# Altium PCB PCB_RX.PcbDoc
Units mil, origin at the board's own origin, x right, y up, seen from the top; angles counter-clockwise.
Board outline 3202.76 x 2149.61 mil, 2 copper layers (Top Layer, Bottom Layer); 112 components, 67 nets, 338 pads, 86 vias.
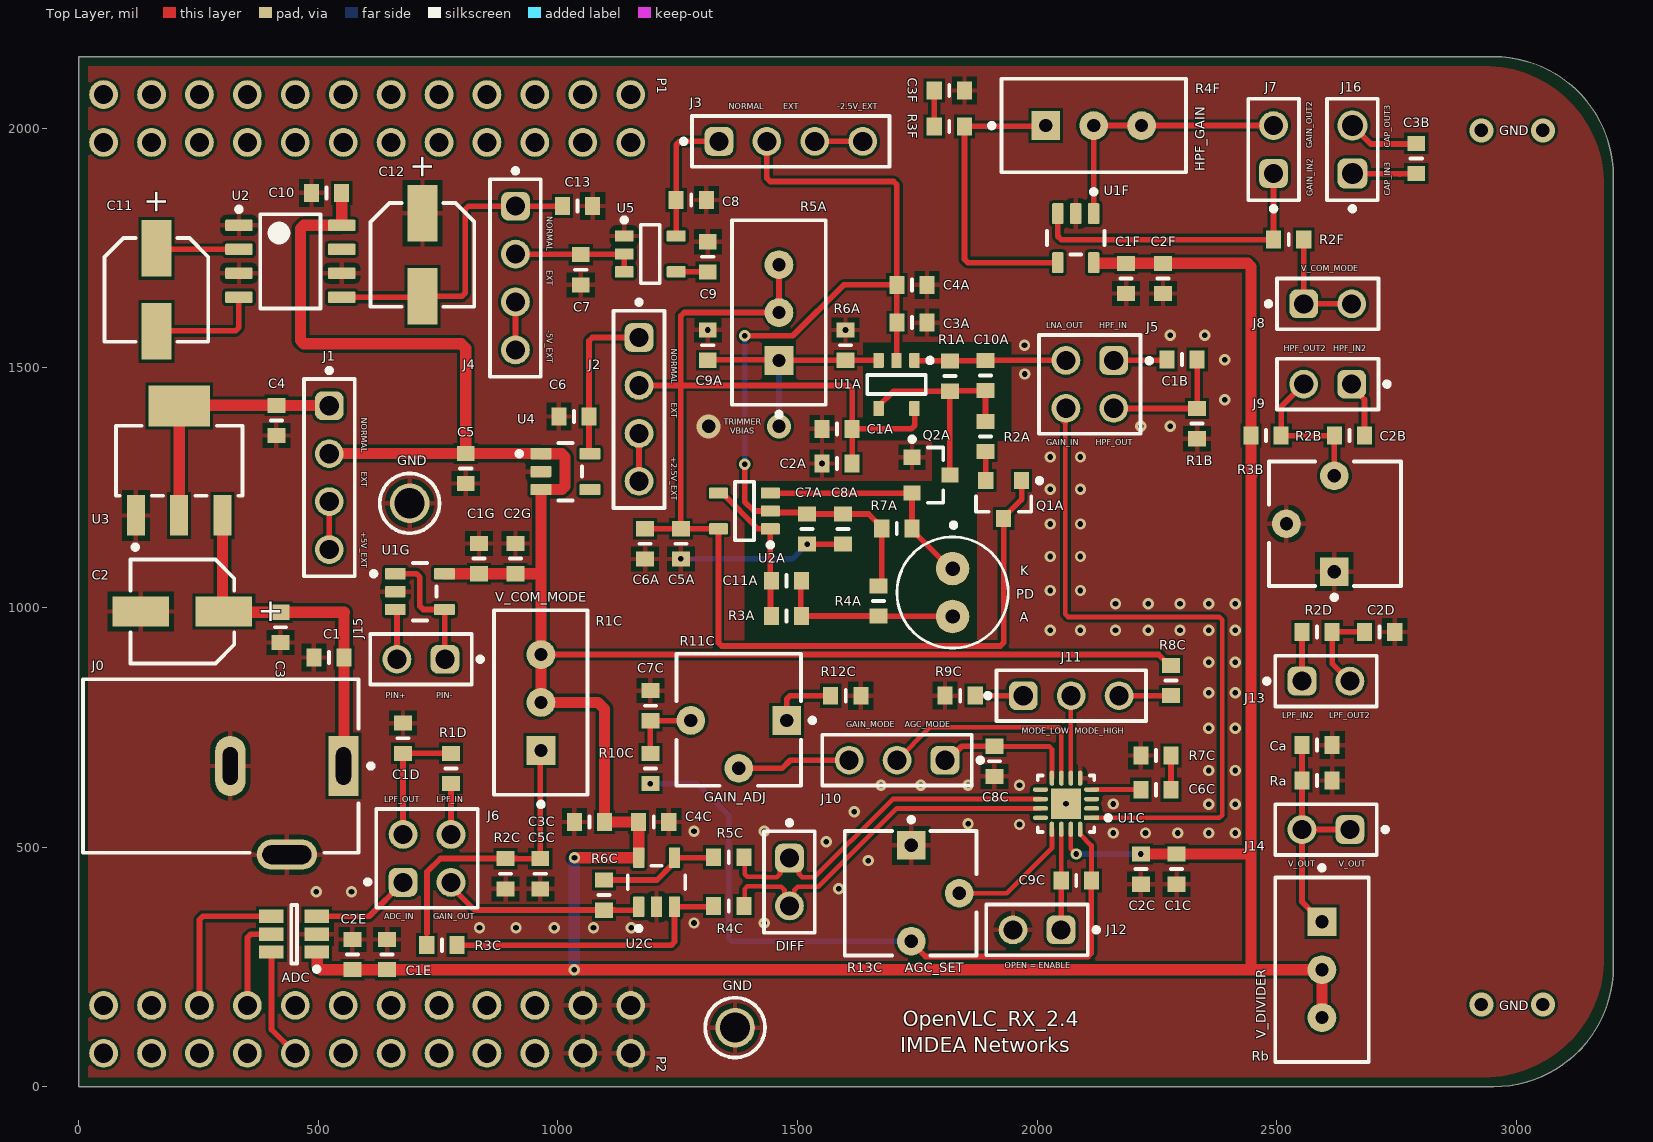
[diagram p0: Top Layer view]
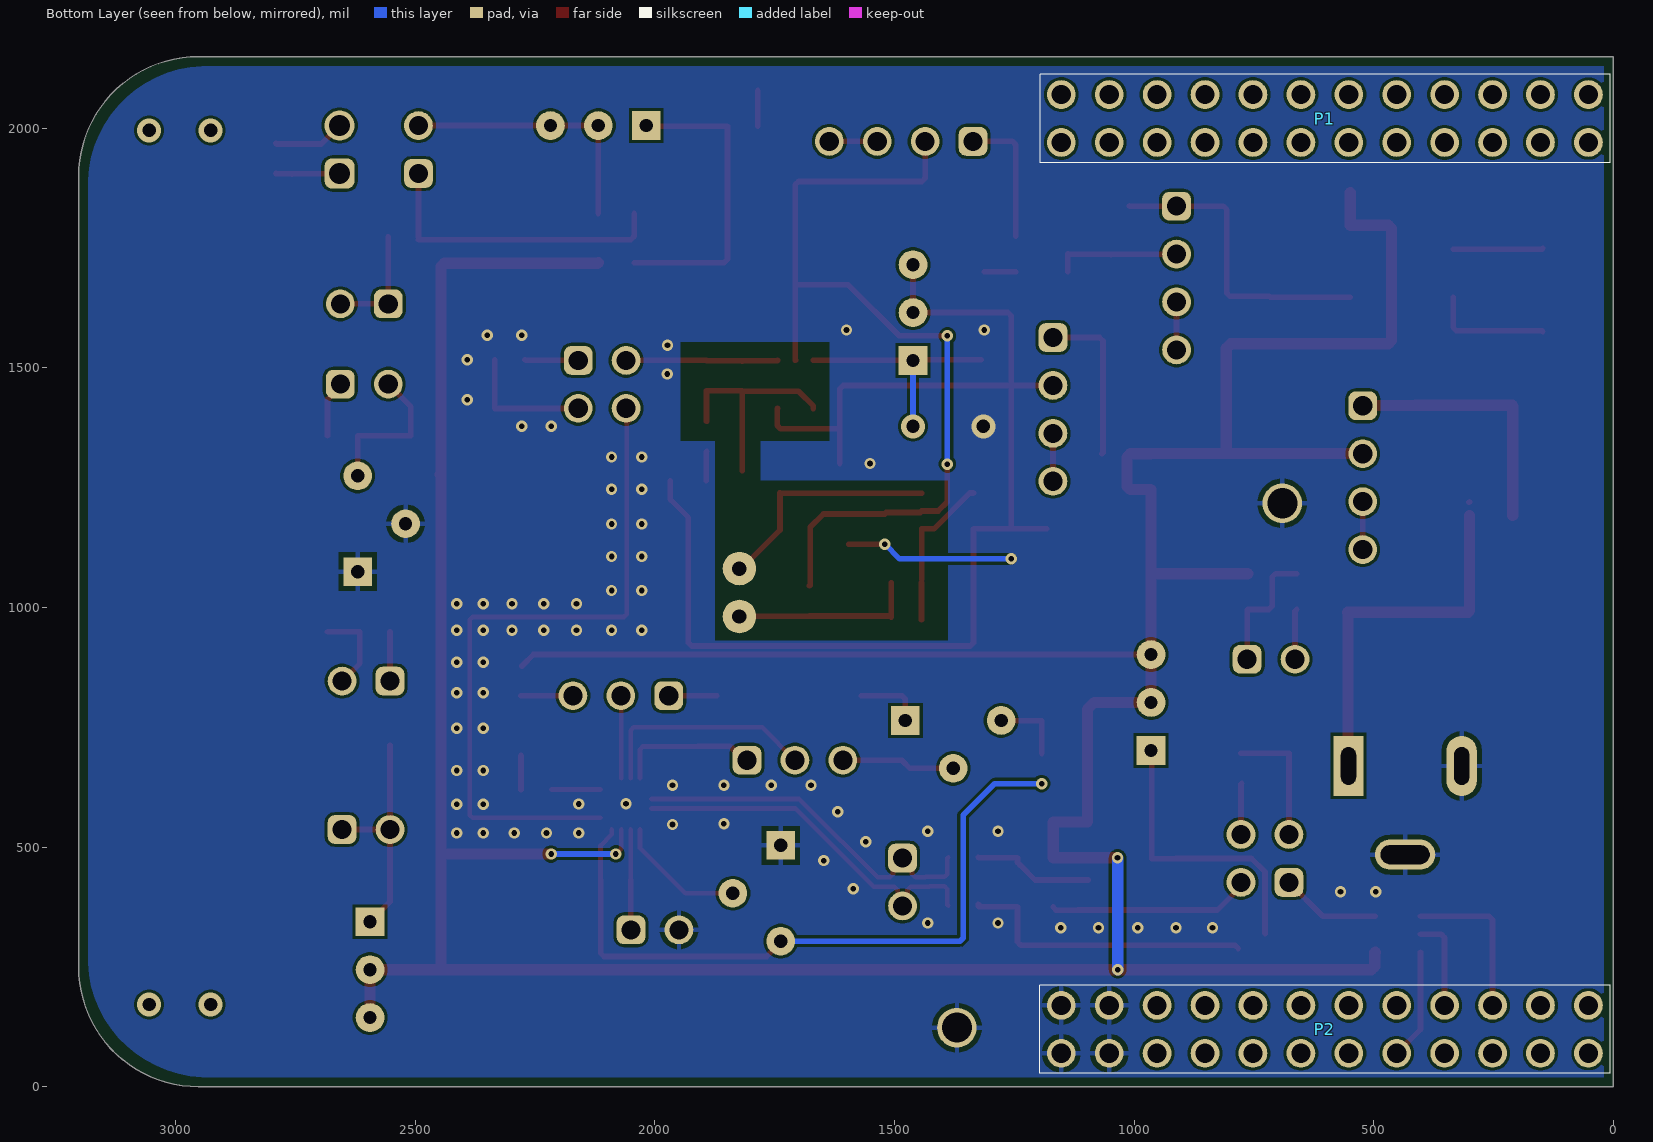
[diagram p1: Bottom Layer view, seen from below]

## Layer stack, top to bottom
Top Solder: solder mask 0.4, Solder Resist, Dk 3.5
Top Layer: signal copper 1.4
Dielectric1: dielectric 12.6, FR-4, Dk 4.8
Bottom Layer: signal copper 1.4
Bottom Solder: solder mask 0.4, Solder Resist, Dk 3.5

## Board outline
0,-0.02 2952.76,-0.02 ccw(c2952.76,249.98) 3202.76,249.98 3202.76,1899.59 ccw(c2952.76,1899.59) 2952.76,2149.59 0,2149.59

## Design rules (kind name [scope] priority, off if disabled: settings)
Clearance Clearance_1 [(InNet('GND') AND InComponent('DC-DC'))] p1: gap=19.68 ignorepadtopadclearanceinfootprint=FALSE except(0: Arc-Hole Track-Hole SMDPad-Hole THPad-Hole Via-Hole Fill-Hole Poly-Hole Region-Hole Text-Hole)
Clearance [All] p2: gap=5.91 ignorepadtopadclearanceinfootprint=FALSE except(0: Arc-Hole Track-Hole SMDPad-Hole THPad-Hole Via-Hole Fill-Hole Poly-Hole Region-Hole Text-Hole)
DiffPairsRouting [All] p1: maxlimit=11.81 minlimit=9.84 mostfreqgap=11.81 toplayer_prefgap=9.84 toplayer_minwidth=5.91 toplayer_maxwidth=15 toplayer_prefwidth=15 bottomlayer_minwidth=5.91 bottomlayer_maxwidth=15 bottomlayer_prefwidth=15 maxuncoupledlength=500
HoleSize [All] p1: absolutevalues=TRUE maxlimit=100 minlimit=9.84 maxpercent=80.000 minpercent=20.000
MinimumSolderMaskSliver [All] p1: minsoldermaskwidth=5.91
PolygonConnect PolygonConnect_1 [IsVia & InNet('GND')] p1: connectstyle=Direct reliefconductorwidth=10 reliefentries=4 polygonreliefangle="90 Angle" airgapwidth=0
PolygonConnect [All] p2: connectstyle=Relief reliefconductorwidth=10 reliefentries=4 polygonreliefangle="90 Angle" airgapwidth=10
RoutingVias [All] p1: holewidth=28 width=50 viastyle="Through Hole" minholewidth=984.25 minwidth=21.65 maxholewidth=28 maxwidth=50
SMDNeckDown [All] p1: percent=80.000
SilkToSilkClearance [All] p1: silktosilkclearance=5.91
SilkToSolderMaskClearance [IsPad] p1: minsilkscreentomaskgap=5.91 clearancetoexposedcopper=TRUE
SolderMaskExpansion [All] p1: expansion=4 istentingtop=FALSE
SupplyNets "Schematic Supply Nets_5" [InNet('-2.5V')] p1: voltage=0.000
SupplyNets "Schematic Supply Nets_4" [InNet('+2.5V')] p2: voltage=0.000
SupplyNets "Schematic Supply Nets_3" [InNet('+5V')] p3: voltage=0.000
SupplyNets "Schematic Supply Nets_2" [InNet('VEE')] p4: voltage=0.000
SupplyNets "Schematic Supply Nets_1" [InNet('VCC')] p5: voltage=0.000
SupplyNets "Schematic Supply Nets" [InNet('GND')] p6: voltage=0.000
Width [All] p1: maxlimit=39.37 minlimit=5.91 preferedwidth=11.81 minimp=50.000000 maximp=50.000000 favimp=50.000000
25 further rules are at their usual default settings.

## Classes and differential pairs
differential pair OUT: +OUT_P -OUT_N

## Components (designator, comment, footprint, x,y, rotation, side; value= is the part's Value field where it differs from the comment)
ADC "ADS7886SBDBVR" TI-DBV6_M 449.61,318.24 r180 top
C1 "Cap" RESC1608X55N 522.42,895.75 r180 top value=22uF
C1A "Cap" RESC1608X55N 1582.68,1372.79 r180 top value=10nF
C1B "Cap" RESC1608X55N 2302.73,1517.31 r0 top value=130nF
C1C "Cap" RESC1608X55N 2291.4,454.04 r270 top value=10nF
C1D "Cap" RESC1608X55N 677.1,727.14 r90 top value=620pF
C1E "Cap" RESC1608X55N 643.85,275.73 r90 top value=1uF
C1F "Cap" RESC1608X55N 2186.01,1686.58 r270 top value=10nF
C1G "Cap" RESC1608X55N 835.67,1101.97 r90 top value=10nF
C2 "47uF" WCAP-PSLP_D5H5.5 216.54,991.63 r0 top
C2A "Cap" RESC1608X55N 1582.68,1300.44 r180 top value=1uF
C2B "Cap" RESC1608X55N 2651.87,1358.5 r180 top value=130nF
C2C "Cap" RESC1608X55N 2216.63,454.04 r270 top value=2.2uF
C2D "Cap" RESC1608X55N 2714.96,949.07 r0 top value=13pF
C2E "Cap" RESC1608X55N 571.23,275.73 r90 top value=10nF
C2F "Cap" RESC1608X55N 2262.86,1686.58 r270 top value=1uF
C2G "Cap" RESC1608X55N 911.6,1101.97 r90 top value=1uF
C3 "Cap" RESC1608X55N 420.95,958.66 r90 top value=2.2uF
C3A "Cap" RESC1608X55N 1738.98,1594.49 r0 top value=10nF
C3B "Cap" RESC1608X55N 2791.39,1937.17 r90 top value=130nF
C3C "Cap" RESC1608X55N 1066.05,552.2 r180 top value=10nF
C3F "Cap" RESC1608X55N 1817.04,2078.74 r180 top value=1.6nF
C4 "Cap" RESC1608X55N 412.68,1390.41 r90 top value=22uF
C4A "Cap" RESC1608X55N 1738.98,1673.23 r0 top value=1uF
C4C "Cap" RESC1608X55N 1199.98,552.2 r0 top value=1uF
C5 "Cap" RESC1608X55N 807.88,1290.08 r90 top value=2.2uF
C5A "Cap" RESC1608X55N 1256.71,1132.91 r270 top value=10nF
C5C "Cap" RESC1608X55N 963.36,444.38 r90 top value=1uF
C6 "Cap" RESC1608X55N 1033.74,1398.45 r0 top value=22uF
C6A "Cap" RESC1608X55N 1182.3,1132.91 r270 top value=1uF
C6C "Cap" RESC1608X55N 2248.12,619.64 r180 top value=130nF
C7 "Cap" RESC1608X55N 1047.86,1704.81 r90 top value=2.2uF
C7A "Cap" RESC1608X55N 1520.33,1163.7 r270 top value=10nF
C7C "Cap" RESC1608X55N 1193.05,795.07 r270 top value=2.2uF
C8 "Cap" RESC1608X55N 1278.52,1850.39 r180 top value=22uF
C8A "Cap" RESC1608X55N 1595.48,1163.7 r270 top value=1uF
C8C "Cap" RESC1608X55N 1910.96,679.05 r90 top value=2.2uF
C9 "Cap" RESC1608X55N 1312.9,1731.79 r270 top value=10nF
C9A "Cap" RESC1608X55N 1312.9,1547.47 r270 top value=1uF
C9C "Cap" RESC1608X55N 2081.96,430.68 r180 top value=2.2uF
C10 "Cap" RESC1608X55N 517.37,1865.36 r0 top value=2.2uF
C10A "Cap" RESC1608X55N 1892.41,1484.11 r90 top value=0.2pF
C11 "47uF" WCAP-PSLP_D5H5.5 162.45,1662.73 r90 top
C11A "Cap" RESC1608X55N 1477.2,1055.81 r180 top value=1uF
C12 "47uF" WCAP-PSLP_D5H5.5 717.57,1735.85 r90 top
C13 "Cap" RESC1608X55N 1041.31,1837.71 r180 top value=22uF
Ca "Cap" RESC1608X55N 2584.43,712.69 r180 top value=1uF
DIFF "61300211121" 61300211121#1 1483.44,427.11 r270 top
GND "5011" KSTN-5011_V 1369.95,123.32 r0 top
GND "5011" KSTN-5011_V 690.75,1217.37 r0 top
J0 "PJ-102A" FP-PJ-102A-MFG 296.85,669.29 r90 top
J1 "61300411121" 61300411121 523.06,1270.91 r270 top
J2 "61300411121" 61300411121 1169.43,1413.39 r270 top
J3 "61300411121" 61300411121 1486.19,1972.69 r0 top
J4 "61300411121" 61300411121 911.6,1687.56 r270 top
J5 "61300421121" 61300421121 2110.24,1465.63 r180 top
J6 "61300421121" 61300421121 727.1,476.38 r0 top
J7 "61300211121" 61300211121#1 2493.57,1955.67 r90 top
J8 "61300211121" 61300211121#1 2606.59,1633.6 r0 top
J9 "61300211121" 61300211121#1 2606.55,1466.13 r180 top
J10 "61300311121" 61300311121 1707.96,681.35 r180 top
J11 "61300311121" 61300311121 2071.22,816.01 r0 top
J12 "61300211121" 61300211121#1 2000.07,327.3 r180 top
J13 "61300211121" 61300211121#1 2602.89,846.44 r0 top
J14 "61300211121" 61300211121#1 2602.93,536.65 r180 top
J15 "61300211121" 61300211121#1 714.35,892.02 r180 top
J16 "61300211121" 61300211121#2 2658.11,1955.67 r90 top
P1 "BBB_P8_reduced" BBB_CAPE_NO_HEADER_R_24 2252.13,1970.41 r0 bottom
P2 "BBB_P9_reduced" BBB_CAPE_NO_HEADER_R_24 2252.16,69.73 r0 bottom
PD "SFH213" FP-SFH213-0 1823.78,1031.18 r270 top
Q1A "NESG340033" ONSC-SOT-23-3-318-08_V 1930.37,1225.3 r270 top
Q2A "NESG340033" ONSC-SOT-23-3-318-08_V 1778.65,1276.22 r0 top
R1A "Res1" RESC1608X55N 1818.02,1482.85 r270 top value=300k
R1B "Res1" RESC1608X55N 2334.23,1383.72 r270 top value=120
R1C "500" FP-3296W-MFG 964.57,801.8 r0 top
R1D "Res1" RESC1608X55N 777.1,664.15 r270 top value=120
R2A "Res1" RESC1608X55N 1892.25,1356.9 r270 top value=10M
R2B "Res1" RESC1608X55N 2477.95,1358.5 r0 top value=240
R2C "Res1" RESC1608X55N 891.17,444.38 r270 top value=100
R2D "Res1" RESC1608X55N 2584.4,949.07 r180 top value=120
R2F "Res1" RESC1608X55N 2525.06,1767.72 r0 top value=120k
R3A "Res1" RESC1608X55N 1477.2,982.12 r0 top value=20k
R3B "500" BOUR-3362P 2621.75,1174.77 r90 top
R3C "Res1" RESC1608X55N 758.04,295.28 r180 top value=120
R3F "Res1" RESC1608X55N 1817.04,2004.1 r0 top value=10k
R4A "Res1" RESC1608X55N 1669.29,1013.62 r270 top value=100
R4C "Res1" RESC1608X55N 1356.77,377.45 r0 top value=120
R4F "100k" FP-3296W-MFG 2118.21,2005.86 r270 top
R5A "500" FP-3296W-MFG 1461.33,1615.43 r0 top
R5C "Res1" RESC1608X55N 1356.77,478.87 r0 top value=120
R6A "Res1" RESC1608X55N 1600.39,1547.47 r90 top value=100
R6C "Res1" RESC1608X55N 1095.97,399.79 r90 top value=120
R7A "Res1" RESC1608X55N 1707.45,1164.74 r0 top value=10M
R7C "Res1" RESC1608X55N 2248.12,691.14 r180 top value=120
R8C "Res1" RESC1608X55N 2279.56,847.51 r270 top value=10k
R9C "Res1" RESC1608X55N 1839.64,815.93 r0 top value=10k
R10C "Res1" RESC1608X55N 1193.05,663.97 r90 top value=4k
R11C "10k" BOUR-3362P 1377.61,765.73 r180 top
R12C "Res1" RESC1608X55N 1600.79,815.84 r180 top value=1k
R13C "10k" BOUR-3362P 1736.22,403.68 r270 top
Ra "Res1" RESC1608X55N 2584.43,638.92 r0 top value=100
Rb "500" FP-3296W-MFG 2594.77,244.23 r180 top
U1A "LMH6629MFE/NOPB" DBV0005A_L 1706.77,1465.41 r270 top
U1C "AD8338ACPZ-R7" FP-CP-16-22-IPC_C 2060.59,590.51 r180 top
U1F "OPA863ADBVR" FP-DBV0005A-MFG 2080.81,1770.85 r270 top
U1G "OPA863ADBVR" FP-DBV0005A-MFG 712.16,1033.07 r0 top
U2 "LM2663M/NOPB" D0008A_N 441.82,1722.38 r0 top
U2A "OPA820IDBVR" DBV0005A_N 1389.44,1201.42 r180 top
U2C "OPA863ADBVR" FP-DBV0005A-MFG 1206.12,426.67 r90 top
U3 "TLV76150DCYR" FP-DCY0004A-MFG 209.91,1306.24 r90 top
U4 "TPS7A2425DBVR" FP-DBV0005A-MFG 1015.94,1283.51 r0 top
U5 "TPS72325DBVR" DBV0005A_N 1192.85,1737.76 r0 top

## Footprints (in the part's own frame and the unit in brackets; to place one, negate y for a bottom-side part, rotate by r counter-clockwise, add the part's x,y. Pads: shape width x height; smd on the part's side, far side on the other; paste and mask are expansions set on the pad)
61300211121#1 [mil] "Pin Header, pitch 2.54 mm, THT, Vertical, single row, 2p"
  rrect50% 60x60 hole 40: 1(-50,0)
  round 60 hole 40: 2(50,0)
  silkscreen extent -129,-53 106,53, body extent -100,-50 100,50, height 337
61300211121#2 [mil] "Pin Header, pitch 2.54 mm, THT, Vertical, single row, 2p"
  rrect50% 62.99x62.99 hole 43.31: 1(-50,0)
  round 62.99 hole 43.31: 2(50,0)
  silkscreen extent -129,-53 106,53, body extent -100,-50 100,50, height 337
61300311121 [mil] "Pin Header, pitch 2.54 mm, THT, Vertical, single row, 3p"
  rrect50% 60x60 hole 40: 1(-100,0)
  round 60 hole 40: 2(0,0) 3(100,0)
  silkscreen extent -179,-53 156,53, body extent -150,-50 150,50, height 337
61300411121 [mil] "Pin Header, pitch 2.54 mm, THT, Vertical, single row, 4p"
  rrect50% 60x60 hole 40: 1(-150,0)
  round 60 hole 40: 2(-50,0) 3(50,0) 4(150,0)
  silkscreen extent -229,-53 206,53, body extent -200,-50 200,50, height 337
61300421121 [mil] "Pin Header, pitch 2.54 mm, THT, Vertical, dual row, 4p"
  rrect50% 60x60 hole 40: 1(-50,-50)
  round 60 hole 40: 2(-50,50) 3(50,-50) 4(50,50)
  silkscreen extent -129,-103 106,103, body extent -100,-100 100,100, height 338
BBB_CAPE_NO_HEADER_R_24 [mil] "46-pin male header for BeagleBone Black P8,P9"
  round 60 hole 40: 23(-1100,0) 24(-1100,-100) 25(-1200,0) 26(-1200,-100) 27(-1300,0) 28(-1300,-100) 29(-1400,0) 30(-1400,-100) 31(-1500,0) 32(-1500,-100) 33(-1600,0) 34(-1600,-100) 35(-1700,0) 36(-1700,-100) 37(-1800,0) 38(-1800,-100) 39(-1900,0) 40(-1900,-100) 41(-2000,0) 42(-2000,-100) 43(-2100,0) 44(-2100,-100) 45(-2200,0) 46(-2200,-100)
  silkscreen extent -2246,-142 -1056,42
BOUR-3362P [mil] "THD, 3-Leads, Body 6.6x6.99mm, Pitch 2.54mm"
  rect 60x60 hole 27.56 paste-99999 mask+0: 1(-100,1.38)
  round 60 hole 27.56 paste-99999 mask+0: 2(0,101.38) 3(100,1.38)
  silkscreen extent -158,-138 130,138, body extent -130,-138 130,138, height 195
D0008A_N [mm] "SOIC, 8-Leads, Body 5x4mm, Pitch 1.27mm, IPC Medium Density"
  rrect17% 1.45x0.6 smd: 1(-2.725,1.905) 2(-2.725,0.635) 3(-2.725,-0.635) 4(-2.725,-1.905) 5(2.725,-1.905) 6(2.725,-0.635) 7(2.725,0.635) 8(2.725,1.905)
  silkscreen extent -2.85,-2.5 1.6,2.88, body extent -3,-2.45 3,2.45, height 1.63
DBV0005A_L [mm] "SOT23, 5-Leads, Body 3.05x1.75mm, Pitch 0.95mm, IPC High Density"
  rrect18% 0.8x0.55 smd: 1(-1.275,0.95) 2(-1.275,0) 3(-1.275,-0.95) 4(1.275,-0.95) 5(1.275,0.95)
  silkscreen extent -1.4,-1.55 0.5,1.9, body extent -1.42,-1.46 1.42,1.46, height 1.08
DBV0005A_N [mm] "SOT23, 5-Leads, Body 3.05x1.75mm, Pitch 0.95mm, IPC Medium Density"
  rrect17% 1x0.6 smd: 1(-1.375,0.95) 2(-1.375,0) 3(-1.375,-0.95) 4(1.375,-0.95) 5(1.375,0.95)
  silkscreen extent -1.5,-1.55 0.5,1.92, body extent -1.42,-1.46 1.42,1.46, height 1.08
FP-3296W-MFG [mil]
  rect 60x60 hole 27.56 paste-99999 mask+0: 1(0.2,-100)
  round 60 hole 27.56 paste-99999 mask+0: 2(0.2,0) 3(0.2,100)
  silkscreen extent -98,-218 98,193, body extent -102,-196 102,196, height 10
FP-CP-16-22-IPC_C [mm]
  rect 0.806x0.239 smd paste+0 mask+0: 1(-1.353,0.75)
  rrect100% 0.806x0.239 smd paste+0 mask+0: 2(-1.353,0.25) 3(-1.353,-0.25) 4(-1.353,-0.75) 9(1.353,-0.75) 10(1.353,-0.25) 11(1.353,0.25) 12(1.353,0.75)
  rrect100% 0.239x0.806 smd paste+0 mask+0: 5(-0.75,-1.353) 6(-0.25,-1.353) 7(0.25,-1.353) 8(0.75,-1.353) 13(0.75,1.353) 14(0.25,1.353) 15(-0.25,1.353) 16(-0.75,1.353)
  rect 1.6x1.6 smd paste-1000 mask+0: 17(0,0)
  silkscreen extent -2.36,-1.5 1.5,1.5, body extent -1.86,-1.86 1.86,1.86, height 0.25
FP-DBV0005A-MFG [mm]
  rrect17% 1.1x0.6 smd paste+0 mask+0: 1(-1.3,0.95) 2(-1.3,0) 3(-1.3,-0.95) 4(1.3,-0.95) 5(1.3,0.95)
  silkscreen extent -2.57,-1.53 0.87,1.53, body extent -1.95,-1.78 1.95,1.78, height 0.25
FP-DCY0004A-MFG [mm]
  rect 2.15x0.95 smd paste+0 mask+0: 1(-2.9,2.3) 2(-2.9,0) 3(-2.9,-2.3)
  rect 2.15x3.25 smd paste+0 mask+0: 4(2.9,0)
  silkscreen extent -4.7,-3.35 1.85,3.35, body extent -4.08,-3.45 4.08,3.45, height 0.25
FP-PJ-102A-MFG [mm]
  rect 3.2x1.6 hole 0.8 slot 2 at 0 deg paste-2539.97 mask+0: 1(0,-6.5)
  rrect100% 3.2x1.6 hole 0.8 slot 2 at 0 deg paste-2539.97 mask+0: 2(0,-0.5)
  rrect100% 1.6x3.2 hole 2.6 slot 1 at 0 deg paste-2539.97 mask+0: 3(-4.7,-3.5)
  silkscreen extent -4.6,-8.08 4.6,7.3, body extent -5.6,-7.4 4.7,7.4, height 0.25
FP-SFH213-0 [mil]
  round 70 hole 30 paste-99999 mask+0: 1(-50,0) 2(50,0)
  silkscreen extent -146,-116 116,116, body extent -120,-120 120,120, height 10
KSTN-5011_V [mm] "Test Point, Dia 3.17mm"
  round 2.1 hole 1.6: 1(0,0)
  silkscreen extent -1.59,-1.58 1.59,1.58, body extent -1.59,-1.59 1.59,1.59, height 8.13
ONSC-SOT-23-3-318-08_V [mm] "SOT23, 3-Leads, Body 2.92x1.3mm, Pitch 0.95mm"
  rect 0.9x0.8 smd: 1(-1,0.95) 2(-1,-0.95) 3(1,0)
  silkscreen extent -1.12,-1.46 0.65,2.03, body extent -0.65,-1.46 0.65,1.46, height 1.11
RESC1608X55N [mm]
  rect 0.8x0.95 smd: 1(-0.8,0) 2(0.8,0)
  silkscreen extent 0,-0.3 0,0.3
TI-DBV6_M [mm] "SOT23, 6-Leads, Body 2.9x1.6mm, Pitch 0.95mm, IPC Low Density"
  rect 1.3x0.7 smd: 1(-1.2,0.95) 2(-1.2,0) 3(-1.2,-0.95) 4(1.2,-0.95) 5(1.2,0) 6(1.2,0.95)
  silkscreen extent -1.33,-1.55 0.15,1.97, body extent -0.87,-1.52 0.87,1.53, height 1.45
WCAP-PSLP_D5H5.5 [mm] "Aluminum Polymer Capacitors, body diameter 5mm"
  rect 3x1.6 smd: 1(2.2,0) 2(-2.2,0)
  silkscreen extent -2.75,-2.75 2.75,2.75, body extent -3,-2.65 3,2.65, height 5.5

## Part data
ADC: library part CMP-0003-00246-2, "2.35 to 5.25 V, 12-Bit, 1 MSPS, Serial ADC, -40 to 125 degC, 6-pin SOT23 (DBV6), Green (RoHS & no Sb/Br)", Analog Voltage AV/DD(Max)(V)=5.25, Analog Voltage AV/DD(Min)(V)=2.35, Manufacturer="Texas Instruments", # Input Channels=1, Architecture=SAR, Code_JEDEC=MO-178, ComponentLink1Description="Manufacturer URL", ComponentLink1URL=http://www.ti.com/, ComponentLink2Description=Datasheet, ComponentLink2URL=http://www.ti.com/general/docs/lit/getliterature.tsp?genericPartNumber=ADS7886&fileType=pdf, ComponentLink3Description="Package Specification", ComponentLink3URL=http://www.ti.com/litv/pdf/mpds026h, DatasheetVersion=SLAS492A, Digital Supply(Max)(V)=5.25, Digital Supply(Min)(V)=2.35, Eco-Plan="Green (RoHS & no Sb/Br)", INL(Max)(+/-LSB)=1.25, Interface="Serial SPI", Mounting Technology="Surface Mount", PackageDescription="6-Pin Plastic Small Outline, Body 1.6 x 2.9 mm, Pitch 0.95 mm", PackageReference=DBV6, PackageVersion="4073253-5/K, 03/2006", PartNumber=ADS7886SBDBVR, Resolution(Bits)=12, Sample Rate (max)(SPS)=1M, SFDR(dB)=85.5, SINAD(dB)=71.25, SNR(dB)=71.25, SubFamily="Precision ADC (<=10MSPS)"
C1 C1A C1B C1C C1D C1E C1F C1G C2A C2B C2C C2D C2E C2F C2G C3 C3A C3B C3C C3F C4 C4A C4C C5 C5A C5C C6 C6A C6C C7 C7A C7C C8 C8A C8C C9 C9A C9C C10 C10A C11A C13 Ca: "Capacitor", LatestRevisionDate=17-Jul-2002, LatestRevisionNote="Re-released for DXP Platform.", PackageDescription="Radial Cap, Thru-Hole; 2 Leads; 0.3 in Pin Spacing", PackageReference=RAD-0.3, Published=8-Jun-2000, Publisher="Altium Limited"
C2 C11 C12: library part CMP-03913-53758736-1, "875105242006 WCAP-PSLP Aluminum Polymer Capacitors", Capacitance=47µF, Case/Package=Radial, ESR (Equivalent Series Resistance)=30mΩ, Leakage Current=300µA, Max Operating Temperature=105°C, Min Operating Temperature=-55°C, Ripple Current=1.97A, Tolerance=20%, Voltage Rating=10V, Diameter=5mm, Height - Seated (Max)=5.5118mm, Length=5.5mm, Life (Hours)=2000hours, Mount="Surface Mount", NexarPartId=53758736, Packaging="Tape & Reel (TR)", Pitch=5.3mm, Polarity=Polar, REACH SVHC=Unknown, RoHS=Compliant, Voltage Rating (DC)=10V
DIFF J7 J8 J9 J12 J13 J14 J15 J16: library part CMP-1712-00002-6, Color=Black, Contact Resistance=20mΩ, Current Rating=3A, Max Operating Temperature=125°C, Min Operating Temperature=-40°C, Operating Supply Voltage=250V, Connector Type="Male Pin", Contact Gender=Male, Contact Material=Copper, Contact Mating Length=5.9944mm, Contact Plating=Gold, Gender=Male, Height=8.94mm, Housing Material=PBT, Lead Free="Lead Free", Lead Pitch=2.54mm, Mount="Through Hole", NexarPartId=20081794, Number of Contacts=2, Number of Pins=2, Number of Positions=2, Number of Rows=1, Orientation=Vertical, Packaging=Bulk, Pitch=2.54mm, REACH SVHC="No SVHC", RoHS=Compliant, Termination="Through Hole", Voltage Rating=250V
GND GND: library part CMP-1672-00003-4, "Test Point, Black, Through Hole, RoHS, Bulk", Colour=Black, Manufacturer=Keystone, Package Quantity=100, ComponentLink1Description="Manufacturer URL", ComponentLink1URL=http://www.keyelco.com/, ComponentLink2Description=Datasheet, ComponentLink2URL=http://www.keyelco.com/product-pdf.cfm?p=1320, Contact Material=Bronze, Contact Plating=Silver, DatasheetVersion="Rev. F, 12/2013", Height="8.12 mm", Mount="Through Hole", Mounting Technology="Through Hole", PackageDescription="1-Pin Through Hole Device, Dia 3.17 mm", PackageReference=5011, Packaging=Bulk, Pins=1, REACH SVHC="No SVHC", RoHSCompliant=true
J0: library part CMP-12637-106234071-1, "PJ-102A 2.0 x 6.5 mm, 2.5 A, Horizontal, Through Hole, Tapered Pins, Dc Power Jack Connector", Color=Black, Current Rating=2.5A, Flammability Rating="UL94 V-0", Insulation Resistance=50MΩ, Max Operating Temperature=85°C, Min Operating Temperature=-25°C, Voltage Rating=24V, Contact Gender=Male, Contact Material="Copper, Nickel, Tin", Contact Plating=Nickel, Diameter=2.1mm, Gender=Male, Height=11.2mm, Housing Color=Black, Housing Material=Thermoplastic, Inside Diameter=2mm, Lead Free="Lead Free", Lifecycle Status=Production, Mount="Through Hole", NexarPartId=106234071, Number of Conductors=2, Number of Contacts=3, Orientation=Horizontal, Outside Diameter=6.5mm, Packaging=Bulk, RoHS=Compliant, Schedule B="8536695050, 8536695050", Shielding=No, Termination="Through Hole", Voltage Rating (DC)=24V
J1 J2 J3 J4: library part CMP-1502-01064-3, Color=Black, Contact Resistance=20mΩ, Current Rating=3A, Max Operating Temperature=105°C, Min Operating Temperature=-40°C, Operating Supply Voltage=250V, Connector Type="Male Pin", Contact Material=Copper, Contact Mating Length=5.9944mm, Contact Plating=Gold, Gender=Male, Height=8.89mm, Lead Free="Lead Free", Lead Pitch=2.54mm, Mount="Through Hole", NexarPartId=32855522, Number of Contacts=4, Number of Pins=4, Number of Positions=4, Number of Rows=1, Orientation=Vertical, Packaging=Bulk, Pitch=2.54mm, REACH SVHC=Unknown, RoHS=Compliant, Termination=Solder, Voltage Rating=250V
J5 J6: library part CMP-1502-01066-4, Color=Black, Contact Resistance=20mΩ, Current Rating=3A, Max Operating Temperature=105°C, Min Operating Temperature=-40°C, Operating Supply Voltage=250V, Connector Type="Male Pin", Contact Material=Copper, Contact Mating Length=5.9944mm, Contact Plating=Gold, Gender=Male, Height=8.89mm, Lead Free="Lead Free", Lead Pitch=2.54mm, Mount="Through Hole", NexarPartId=32855524, Number of Contacts=4, Number of Pins=4, Number of Positions=4, Number of Rows=2, Orientation=Vertical, Packaging=Bulk, Pitch=2.54mm, REACH SVHC=Unknown, RoHS=Compliant, Row Spacing=2.54mm, Termination=Solder, Voltage Rating=250V
J10 J11: library part CMP-1502-01062-3, Color=Black, Contact Resistance=20mΩ, Current Rating=3A, Max Operating Temperature=105°C, Min Operating Temperature=-40°C, Operating Supply Voltage=250V, Connector Type="Male Pin", Contact Material=Copper, Contact Mating Length=5.9944mm, Contact Plating=Gold, Gender=Male, Height=8.94mm, Lead Free="Lead Free", Lead Pitch=2.54mm, Mount="Through Hole", NexarPartId=32855521, Number of Contacts=3, Number of Pins=3, Number of Positions=3, Number of Rows=1, Orientation=Vertical, Packaging=Bulk, Pitch=2.54mm, REACH SVHC=Unknown, RoHS=Compliant, Termination=Solder, Voltage Rating=250V
PD: library part CMP-62027-000002-1, "SENSOR PHOTODIODE 850NM RADIAL", Dark Current=0.001uA, Forward Current=100mA, Forward Voltage=1.3V, Manufacturer=OSRAM, Power Dissipation=150mW, Reverse Breakdown Voltage=20V, Temperature="-40°C to +100°C", Temperature Range High=+100°C, Temperature Range Low=-40°C, Voltage=50V, Automotive=No, Category=Diode, ComponentLink2Description=Datasheet, ComponentLink2URL=https://dammedia.osram.info/media/resource/hires/osram-dam-5488355/SFH%20213_EN.pdf, Device Class L1=Sensors, Device Class L2="Optical Sensors", Device Class L3=Photodiodes, Digikey Description="SENSOR PHOTODIODE 850NM RADIAL", Ipc Land Pattern Name=CAPRD254W95D570H860, Lead Free=Yes, Manufacturer Part Number=SFH213, Mouser Description="Photodiode PIN Chip 850nm 0.62A/W Sensitivity 2-Pin T-1 3/4 T/R", Octopart=https://octopart.com/sfh+213-osram+opto-55410864, Package=SFH213, RoHS=TRUE, Sensor Output=Photodiode, Wavelength=400-1100nm
Q1A Q2A: library part CMP-0722-00001-2, "General Purpose Transistor, NPN Silicon, 3-Pin SOT-23, Pb-Free, Tape and Reel", Manufacturer="On Semiconductor", PartNumber=MMBT2222LT1G, ComponentLink1Description="Manufacturer URL", ComponentLink1URL=http://www.onsemi.com/, ComponentLink2Description=Datasheet, ComponentLink2URL=http://www.onsemi.cn/pub_link/Collateral/MMBT2222LT1-D.PDF, ComponentLink3Description="Package Specification", ComponentLink3URL=http://www.onsemi.cn/pub_link/Collateral/318-08.PDF, DatasheetVersion="Rev. 10", fT Min (MHz)=250, IC Continuous (A)=0.6, Mounting Technology="Surface Mount", PackageDescription="3-Pin Small Outline Transistor, Body 2.92 x 1.3 mm, Pitch 0.95 mm", PackageReference=SOT-23-3-318-08, PackageVersion="Rev. AP, 11/2009", Packing="Tape and Reel", Polarity=NPN, RoHS=TRUE
R1A R1B R1D R2A R2B R2C R2D R2F R3A R3C R3F R4A R4C R5C R6A R6C R7A R7C R8C R9C R10C R12C Ra: "Resistor", LatestRevisionDate=17-Jul-2002, LatestRevisionNote="Re-released for DXP Platform.", PackageDescription="Axial Device, Thru-Hole; 2 Leads; 0.3 in Pin Spacing", PackageReference=AXIAL-0.3, Published=8-Jun-2000, Publisher="Altium Limited"
R1C R4F R5A Rb: library part CMP-1747-00001-8, "TRIMMER 10K OHM 0.5W PC PIN TOP", Color=Blue, Insulation Resistance=1GR, Max Operating Temperature=125°C, Max Power Dissipation=500mW, Min Operating Temperature=-55°C, Package Quantity=50, Resistance=10kR, Resistance Tolerance=10%, Resistor Type=Cermet, Temperature Coefficient=100ppm/°C, Contact Plating=Tin, Depth=4.83mm, Height=11.55mm, Lead Free="Lead Free", Length=9.53mm, Military Standard=Not, Mount="Through Hole", Number of Turns=25, Packaging=Rail/Tube, Power Rating=500mW, Radiation Hardening=No, Reach SVHC Compliant=Yes, RoHS Compliant=Yes, Series=3296, Taper=Linear, Technology=CERMET, Termination=Pin, Tolerance=10%, Weight=0.03oz, Width=9.53mm
R3B R11C R13C: library part CMP-1747-00004-1, "Square Trimpot(R) Trimming Potentiometer, 10 KOhm, 300 V, -55 to 125 degC, 3-Pin THD, RoHS, Tube", Case Code (Imperial)=0612, Case Code (Metric)=1632, Case/Package=1206, Max Operating Temperature=125degC, Min Operating Temperature=-25degC, Package Quantity=5000, Power Rating="1 W", Resistance="50 mohm", Tolerance=1%, Voltage Rating="220 mV", ComponentLink1Description="Manufacturer URL", ComponentLink1URL=http://www.bourns.com/, ComponentLink2Description=Datasheet, ComponentLink2URL=http://www.bourns.com/docs/Product-Datasheets/3362.pdf, DatasheetVersion=May-16, Height="0.6 mm", Length="3.2 mm", Mount="Surface Mount", PackageDescription="3-Pin Through Hole Device, Body 6.6 x 6.99 mm, Pitch 2.54 mm", PackageReference=3326P, Packaging="Tape and Reel", Pins=2, REACH SVHC="No SVHC", RoHSCompliant=True, Width="1.6 mm"
U1A: library part CMP-0055-01619-3, "Ultra-Low Noise, High-Speed Operational Amplifier with Shutdown, 5-pin SOT-23, 250 Reel", Manufacturer="Texas Instruments", Package Reference=DBV0005A, PackageTopMarking=AE7A*XTT, PowerWise=Y, ComponentLink1Description="Datasheet URL", ComponentLink1URL=http://www.ti.com/general/docs/lit/getliterature.tsp?genericPartNumber=LMH6629&fileType=pdf, CompType=Amplifiers, High-Reliability=Y, PackageDescription="Molded SOT-23, .115 x .063 x .040 in Body, 5 Lead, .0375 in Pitch", PartNumber=LMH6629MFE/NOPB, PinCount=5, RoHS=Y
U1C: library part CMP-09116-000032-1, "IC OPAMP VGA 1 CIRCUIT 16LFCSP", Manufacturer="Analog Devices", Max Junction Temp=+150°C, Max Supply Voltage=5V, Min Supply Voltage=3V, Nominal Supply Current=3-6mA, Output Current per Channel=5mA, Package=CP-16-22, Temperature="-40°C to +85°C", Temperature Range High=+85°C, Temperature Range Low=-40°C, Voltage Gain=80dB, Automotive=No, Bandwidth=18MHz, Category=IC, ComponentLink2Description=Datasheet, ComponentLink2URL=https://www.analog.com/media/en/technical-documentation/data-sheets/AD8338.pdf, Device Class L1="Integrated Circuits (ICs)", Device Class L2="Linear ICs", Device Class L3="Amplifiers - Op Amps", Digikey Description="IC OPAMP VGA 1 CIRCUIT 16LFCSP", Height=0.8mm, Ipc Land Pattern Name=QFN50P300X300X75-16, Lead Free=Yes, Manufacturer Part Number=AD8338ACPZ-R7, Mouser Description="Special Purpose Amplifiers Ultra Low Pwr 18MHz SGL CH VGA", Number of Channels=1, Octopart=https://octopart.com/ad8338acpz-r7-analog+devices-21054770, RoHS=TRUE
U1F U1G U2C: library part CMP-00370-145533195-1, "OPA863ADBVR Single-channel, high-precision, low-power, 105-MHz, 12-V RRIO voltage-feedback amplifier 5-SOT-23 -40 to 125", Ambient Temperature Range High=125°C, Case/Package=SOT-23, Input Bias Current=300nA, Input Offset Voltage (Vos)=10µV, Manufacturer Lifecycle Status=ACTIVE, Max Junction Temperature (Tj)=150°C, Max Supply Voltage=12.6V, Min Operating Temperature=-40°C, Min Supply Voltage=2.7V, Nominal Supply Current=800µA, Output Current per Channel=30mA, Voltage Gain=128dB, Bandwidth=105MHz, Height=1.45mm, Length=2.9mm, Lifecycle Status=Production, Max Operating Temperature=125°C, NexarPartId=145533195, Number of Channels=1, Number of Pins=5, Response Time=70ns, Thickness=1.2mm, Width=1.6mm
U2: library part CMP-0065-00037-3, "Switched Capacitor Voltage Converter, 8-pin Narrow SOIC, Pb-Free", Manufacturer="Texas Instruments", PackageTopMarking=NSZXTT*LM26*63M, PowerWise=N, Code_IPC=SOIC127P600-8, Code_JEDEC=MS-012-AA, ComponentLink1Description="Datasheet URL", ComponentLink1URL=http://www.ti.com/general/docs/lit/getliterature.tsp?genericPartNumber=LM2663&fileType=pdf, CompType="Switch Caps", PackageDescription="SOIC Narrow, 4.9 x 3.9 x 1.45mm, 8 Lead, 1.27mm Pitch", PackageReference=D0008A, PinCount=8, RoHS=Y
U2A: library part CMP-0018-00428-2, "Unity Gain Stable, Low Noise, Voltage Feedback Operational Amplifier, 5 to 12 V, -40 to 85 degC, 5-pin SOT23 (DBV5), Green (RoHS & no Sb/Br)", Manufacturer="Texas Instruments", 2nd Harmonic(dBc)=90, 3rd Harmonic(dBc)=110, @ MHz=1, Acl, min stable gain(V/V)=1, BW @ Acl(MHz)=700, Code_JEDEC=MO-178, ComponentLink1Description="Manufacturer URL", ComponentLink1URL=http://www.ti.com/, ComponentLink2Description=Datasheet, ComponentLink2URL=http://www.ti.com/general/docs/lit/getliterature.tsp?genericPartNumber=OPA820&fileType=pdf, ComponentLink3Description="Package Specification", ComponentLink3URL=http://www.ti.com/litv/pdf/mpds018i, DatasheetVersion=SBOS303C, Diff Gain(%)=0.01, Diff Phase(deg)=0.03, Eco-Plan="Green (RoHS & no Sb/Br)", Iib(Max)(nA)=2300, Io(Typ)(mA)=110, Iq per channel(Max)(mA)=6.4, Mounting Technology="Surface Mount", Number of Channels=1, PackageDescription="5-Pin Plastic Small Outline, Body 1.6 x 2.9 mm, Pitch 0.95 mm", PackageReference=DBV0005A, PackageVersion="4073253-4/K, 03/2006", PartNumber=OPA820IDBVR, Settling Time (0.1%)(Typ)(ns)=26, Slew Rate(Typ)(V/us)=240, Sub Family="High Output Current Amplifier (>=50mA), High Speed Amplifier (>=50MHz)", THD (Fc is 1 MHz)(Typ)(dB)=-85, Vio(Max)(mV)=1, Vn at Flatband(Typ)(nV/rtHz)=2.5, Vs(Max)(V)=12, Vs(Min)(V)=5
U3: library part CMP-00370-134324849-1, "TLV76150DCYR 1-A 16-V high-PSRR linear voltage regulator 4-SOT-223 -40 to 125", Case/Package=SOT-223, Dropout Voltage=900mV, Manufacturer Lifecycle Status=ACTIVE, Max Junction Temperature (Tj)=125°C, Max Supply Voltage=16V, Min Operating Temperature=-40°C, Min Supply Voltage=6.5V, Nominal Supply Current=65µA, Output Current=1A, Output Voltage=5V, Accuracy=1%, Height=1.8mm, Length=6.5mm, Lifecycle Status=Production, Max Operating Temperature=125°C, NexarPartId=134324849, Number of Channels=1, Number of Outputs=1, Number of Pins=4, Thickness=1.6mm, Width=3.5mm
U4: library part CMP-00370-106221449-1, "TPS7A2425DBVR 200-mA, 18-V, ultra-low-IQ, low-dropout (LDO) voltage regulator with enable ; 5-SOT-23 -40 to 125", Case/Package=SOT-23, Dropout Voltage=160mV, Manufacturer Lifecycle Status=ACTIVE, Max Junction Temperature (Tj)=125°C, Max Supply Voltage=18V, Min Operating Temperature=-40°C, Min Supply Voltage=3V, Output Current=200mA, Output Voltage=2.5V, Accuracy=1.25%, Height=1.45mm, Length=2.9mm, Lifecycle Status=Production, Max Operating Temperature=125°C, NexarPartId=106221449, Number of Channels=1, Number of Outputs=1, Number of Pins=5, Thickness=1.2mm, Width=1.6mm
U5: library part CMP-0394-00292-2, "Single Output High PSRR LDO, 200 mA, Fixed -2.5 V Output, -10 to -2.7 V Input, 5-pin SOT-23 (DBV), -40 to 125 degC, Green (RoHS & no Sb/Br)", Manufacturer="Texas Instruments", Accuracy(%)=2, Code_JEDEC=MO-178, ComponentLink1Description="Manufacturer URL", ComponentLink1URL=http://www.ti.com/, ComponentLink2Description=Datasheet, ComponentLink2URL=http://www.ti.com/general/docs/lit/getliterature.tsp?genericPartNumber=TPS72325&fileType=pdf, ComponentLink3Description="Package Specification", ComponentLink3URL=http://www.ti.com/litv/pdf/mpds018i, DatasheetVersion=SLVS346B, Eco-Plan="Green (RoHS & no Sb/Br)", Fixed Output Options(V)=-2.5, Iout(Max)(A)=0.2, Iq(Typ)(mA)=0.13, Mounting Technology="Surface Mount", PackageDescription="5-Pin Plastic Small Outline, Body 1.60 Ãƒâ€” 2.90 mm, Pitch 0.95 mm", PackageReference=DBV0005A, PackageVersion=4073253-4/K, PartNumber=TPS72325DBVR, SubFamily="Single Channel LDO", Vdo(Typ)(mV)=280, Vin(Max)(V)=-2.7, Vin(Min)(V)=-10, Vout Adj(Max)(V)=-2.5, Vout Adj(Min)(V)=-2.5

## Via types
v1: diameter 23.62, hole 11.81, Top Layer to Bottom Layer, 80 vias
v2: diameter 50, hole 28, Top Layer to Bottom Layer, 6 vias

## Nets (pads, with @x,y where several pads share a name; then routed paths per layer and width w, separated by ;. In a path a pad name is that pad's centre, name@x,y a point inside that pad or via, vN(x,y) a via of type N, cw(c..) or ccw(c..) an arc to the next point about the centre after c; other vN are vias at no path point)
+2.5V: C1A.1 C2A.1 C5A.1 C6A.1 J2.2 Q1A.1 Q1A.3 R5A.2 R5A.3 U1A.5 U2A.5 | length 2868.2
  Top Layer w11.81: J2.2 1256.71,1463.39 ; C6A.1 C5A.1 ; R5A.3 R5A.2 1263.63,1615.43 1256.71,1608.51 1256.71,1463.39 ; C2A.1 C1A.1 ; U1A.5 1744.93,1414.46 1744.93,1379.71 1738.01,1372.79 C1A.1 ; Q1A.3 1930.37,926.43 1923.45,919.51 1342.23,919.51 1335.31,926.43 U2A.5 1335.11,1164.21 1256.9,1164.21 C5A.1 ; Q1A.3@1930.37,1187.9 1967.77,1225.3 Q1A.1 ; C5A.1 1256.71,1463.39 ; 1256.71,1463.39 1607.25,1463.39 1614.17,1456.47 C1A.1
+5V: C1.1 C2.1 C3.2 J0.1 U3.3 | length 775.5
  Top Layer w11.81: U3.3@300.35,1220.13 U3.3@301.17,1219.31
  Top Layer w23.62: U3.3 300.46,994.32 C2.1 ; C2.1@303.15,990.34 553.92,990.34 ; J0.1 553.92,670.46 C1.1 553.92,990.34 ; 554.38,990.34 553.92,990.34
-2.5V: C3A.1 C4A.1 C7A.1 C8A.1 J3.2 R4A.1 R7A.1 U1A.2 U2A.2 | length 1859.9
  Top Layer w11.81: v1(1389.76,1299.21) 1389.76,1220.78 1409.13,1201.42 U2A.2 1446.69,1198.31 1517.22,1198.31 C7A.1 C8A.1 1648.46,1195.19 1675.96,1167.7 R7A.1 1675.96,1046.7 R4A.1@1677.54,1045.11 ; v1(1389.76,1566.93) 1490.29,1566.93 1596.58,1673.23 C4A.1 ; J3.2 1436.19,1896.03 1443.11,1889.11 1700.57,1889.11 1707.48,1882.19 C4A.1 ; U1A.2 1707.13,1515.97 1707.13,1578.61 1707.48,1578.97 C3A.1 C4A.1
  Bottom Layer w11.81: v1(1389.76,1299.21) v1(1389.76,1566.93)
ADC_IN: ADC.3 J6.1 | length 209.6
  Top Layer w11.81: ADC.3 606.37,355.65 J6.1
CAP_IN3: C3B.1 J16.1 | length 134.9
  Top Layer w11.81: J16.1 2658.83,1904.95 2756.49,1904.95 ; 2757.21,1904.22 2756.49,1904.95 ; C3B.1 2790.67,1904.95 2756.49,1904.95
CAP_OUT3: C3B.2 J16.2 | length 149.8
  Top Layer w11.81: J16.2 2696.56,1967.21 2789.94,1967.21 C3B.2
CS_PD: ADC.6 P2.37 | length 231.7
  Top Layer w11.81: ADC.6 402.36,119.52 P2.37
DETO: C8C.2 J10.1 U1C.8 | length 298.3
  Top Layer w9.84: J10.1 J10.1@1813.82,681.35 ; C8C.2 1911.48,710.03 2025.3,710.03 2031.07,704.26 U1C.8
  Top Layer w11.81: J10.1@1813.82,681.35 1843.01,710.55 C8C.2
GAIN: J10.2 U1C.7 | length 473.8
  Top Layer w9.84: J10.2 1776.44,749.83 2044.99,749.83 2050.75,744.07 U1C.7
GAIN_IN: J5.4 U1C.1 | length 1450.2
  Top Layer w9.84: J5.4@2059.06,1386.68 2059.06,986.1 2064.82,980.33 2380.52,980.33 2386.28,974.57 2386.28,566.75 2380.52,560.98 U1C.1
  Top Layer w11.81: J5.4@2044.49,1415.63 2044.49,1401.25 J5.4@2059.06,1386.68
GAIN_IN2: J7.1 R2F.1 U1F.3 | length 632.5
  Top Layer w11.81: U1F.3 2043.41,1774.64 2050.33,1767.72 R2F.1 ; R2F.1@2493.57,1773.63 J7.1@2493.57,1905.66
GAIN_OUT: J6.3 R6C.1 U2C.1 | length 437.2
  Top Layer w11.81: J6.3@777.1,418.14 826.44,368.8 1118.11,368.8 ; R6C.1@1096.66,368.3 1162.81,368.3 1168.72,374.2 U2C.1
GAIN_OUT2: J7.2 R4F.2 R4F.3 U1F.1 | length 559
  Top Layer w11.81: U1F.1 R4F.2 R4F.3 J7.2@2493.57,2005.66
GND: ADC.2 C1.2 C1A.2 C1C.2 C1D.2 C1E.2 C1F.2 C1G.2 C2.2 C2A.2 C2C.2 C2D.2 C2E.2 C2F.2 C2G.2 C3.1 C3A.2 C3C.2 C3F.1 C4.1 C4A.2 C4C.2 C5.1 C5A.2 C5C.1 C6.1 C6A.2 C7.1 C7A.2 C7C.1 C8.1 C8A.2 C8C.1 C9.1 C9A.1 C10.1 C12.1 C13.1 Ca.1 GND.1 J0.2 J0.3 J12.2 P2.23 P2.24 P2.25 P2.26 Q2A.1 R1B.2 R2C.2 R3B.1 R3B.2 R6A.2 R7C.2 R9C.1 R12C.1 R13C.1 Ra.2 U1C.5 U1C.17 U1F.2 U1G.2 U2.1 U2.3 U2.6 U2C.2 U3.1 U4.2 U5.1 | length 351.5
  Top Layer w11.81: v1(1520.33,1132.2) C8A.2
  Bottom Layer w11.81: v1(1256.71,1101.42) 1489.54,1101.42 v1(1520.33,1132.2)
  other v1: 836.6,331.69 912.67,331.69 992.51,331.69 1074.45,331.69 1153.11,331.69 1284.33,341.61 1430.55,341.61 495.97,406.85 569.56,406.85 1586.47,413.39 1647.99,471.86 1559.96,511.06 2158.78,529.53 2226.27,529.53 2293.84,529.53 2358.27,529.53 2413.39,529.53 1284.33,533.03 1430.55,533.03 1963.43,547.01 1856.14,548.48 1618.88,573.5 2060.59,590.51 2158.78,589.93 2358.27,589.65 2413.39,589.65 1674.28,628.9 1757.53,628.9 1856.14,628.9 1963.43,628.9 2358.27,659.92 2413.39,659.92 2358.27,747.83 2413.39,747.83 2358.27,821.85 2413.39,821.85 2358.27,885.83 2413.39,885.83 2027.56,952.76 2090.55,952.76 2163.66,952.76 2232.28,952.76 2298.27,952.76 2358.27,952.76 2413.39,952.76 2163.66,1007.87 2232.28,1007.87 2298.27,1007.87 2358.27,1007.87 2413.39,1007.87 2027.56,1035.43 2090.55,1035.43 2027.56,1106.57 2090.55,1106.57 2027.56,1174.17 2090.55,1174.17 2027.56,1247.09 2090.55,1247.09 1551.18,1300.44 2027.56,1314.13 2090.55,1314.13 2216.14,1378.27 2278.23,1378.27 2391.77,1433.68 1974.36,1487.33 2391.77,1517.04 1973.83,1547.02 2278.23,1568.07 2349.88,1568.07 1312.9,1578.97 1600.39,1578.97
  other v2: 1314.59,1377.95
HPF_IN: C1B.1 J5.1 | length 111.7
  Top Layer w11.81: J5.1 2269.56,1515.63 C1B.1
HPF_IN2: C2B.1 J9.1 | length 118.7
  Top Layer w11.81: J9.1 2656.55,1460.8 2683.36,1433.98 C2B.1
HPF_OUT: C1B.2 J5.2 R1B.1 | length 276.3
  Top Layer w11.81: J5.2 2160.44,1415.43 2334.02,1415.43 R1B.1 C1B.2
HPF_OUT2: C2B.2 J9.2 R2B.2 R3B.3 | length 321.8
  Top Layer w11.81: J9.2 2509.45,1419.03 R2B.2 C2B.2 R3B.3
LNA_OUT: C10A.2 J5.3 R1A.1 U1A.1 | length 297.4
  Top Layer w11.81: U1A.1 1744.8,1514.98 1817.39,1514.98 R1A.1 1818.66,1514.98 1891.78,1514.98 C10A.2 J5.3@2040.47,1515.62
LPF_IN: J6.4 R1D.2 | length 106.8
  Top Layer w11.81: R1D.2@775.87,632.65 777.1,631.43 J6.4
LPF_IN2: J13.1 R2D.2 | length 102.6
  Top Layer w11.81: J13.1 R2D.2
LPF_OUT: C1D.1 J6.2 R1D.1 | length 269.3
  Top Layer w11.81: J6.2 C1D.1 R1D.1
LPF_OUT2: C2D.1 J13.2 R2D.1 | length 185.5
  Top Layer w11.81: J13.2 2615.89,883.43 R2D.1 C2D.1
MISO_PD: ADC.5 P2.40 | length 194.5
  Top Layer w11.81: P2.40 352.37,169.94 352.37,311.33 359.29,318.24 ADC.5
MODE: J11.2 U1C.6 | length 182.2
  Top Layer w9.84: J11.2@2070.34,815.12 J11.2 ; U1C.6 2070.65,643.99 J11.2@2070.65,824.65
MOSI_PD: ADC.4 P2.42 | length 332
  Top Layer w11.81: P2.42 252.33,169.9 252.33,348.73 259.25,355.65 ADC.4
NetC3F_2: C3F.2 R3F.1 | length 74.6
  Top Layer w11.81: R3F.1 C3F.2
NetC4_2: C4.2 J1.1 U3.2 U3.4 | length 542.5
  Top Layer w23.62: U3.2 U3.4 211.4,1421.91 C4.2 413.18,1421.41 522.57,1421.41 J1.1
NetC5C_2: C5C.2 R1C.1 R2C.1 R3C.2 | length 625.7
  Top Layer w11.81: 726.54,319.42 727.1,319.98 727.1,448.45 755.03,476.38 913.31,476.38 ; R2C.1 C5C.2 963.36,700.39 R1C.1
NetC6_2: C6.2 J2.1 U4.5 | length 343.4
  Top Layer w11.81: U4.5 1065.24,1322.8 1065.24,1556.47 1072.16,1563.39 J2.1
NetC6C_1: C6C.1 R7C.1 | length 71.5
  Top Layer w11.81: C6C.1 R7C.1
NetC6C_2: C6C.2 U1C.4 | length 102.9
  Top Layer w9.84: U1C.4 2216.23,620.04 C6C.2
NetC7C_2: C7C.2 R10C.2 R11C.3 | length 153
  Top Layer w11.81: R10C.2 C7C.2 1276.83,763.58 R11C.3
NetC8_2: C8.2 J3.1 U5.5 | length 282.7
  Top Layer w11.81: U5.5@1247,1775.18 C8.2@1247,1836.47 ; C8.2@1247.02,1836.49 1247.02,1965.77 1253.94,1972.69 J3.1
NetC9_2: C9.2 U5.4 | length 65.9
  Top Layer w11.81: U5.4 C9.2
NetC9A_2: C9A.2 R5A.1 R6A.1 U1A.3 | length 488.9
  Top Layer w11.81: C9A.2@1318.9,1516.8 1460.15,1516.8 R5A.1 1462.06,1515.97 1602.36,1515.97 1602.54,1515.79 1669.19,1515.79 U1A.3
  Bottom Layer w11.81: v2(1461.54,1377.95) R5A.1
NetC10A_1: C10A.1 Q2A.3 R1A.2 R2A.1 U1A.4 | length 472.4
  Top Layer w11.81: U1A.4 1669.37,1420.14 1700.58,1451.35 R1A.2 ; Q2A.3@1818.02,1285.15 R1A.2 ; R2A.1@1891.92,1388.72 R2A.1 1892.41,1388.56 C10A.1 1891.78,1451.99 1818.66,1451.99 R1A.2
NetC11_1: C11.1 U2.2 | length 187.8
  Top Layer w11.81: C11.1@147.54,1749.34 149.49,1747.38 U2.2
NetC11_2: C11.2 U2.4 | length 253.6
  Top Layer w11.81: C11.2@147.54,1576.11 148.67,1577.24 327.62,1577.24 334.53,1584.16 U2.4
NetC11A_1: C11A.1 PD.2 R3A.2 R4A.2 | length 389.6
  Top Layer w11.81: C11A.1@1506.78,1051.56 1506.78,980.2 R3A.2 1677.54,982.12 1678.02,981.65 1823.31,981.65 PD.2
NetC11A_2: C11A.2 R3A.1 U2A.1 U2A.4 | length 321.8
  Top Layer w11.81: U2A.4 1343.18,1238.82 1417.98,1164.02 U2A.1 C11A.2@1443.58,1058.48 ; R3A.1@1443.78,974.53 C11A.2@1443.78,1051.56
NetC12_2: C12.2 C13.2 J4.1 U2.5 | length 641.8
  Top Layer w11.81: U2.5 715.71,1647.38 C12.2 799.74,1649.24 806.66,1656.16 806.66,1830.65 813.58,1837.56 J4.1 1009.66,1837.56 C13.2
NetCa_2: Ca.2 J14.1 J14.2 Ra.1 Rb.1 | length 485.7
  Top Layer w11.81: Ca.2 Ra.1 J14.2 ; Rb.1 2552.93,385.87 J14.2 ; J14.1 J14.2
NetJ1_3: J1.3 J1.4 | length 100
  Top Layer w11.81: J1.4 J1.3
NetJ2_3: J2.3 J2.4 | length 100
  Top Layer w11.81: J2.4@1169.43,1271.2 J2.3@1169.43,1371.2
NetJ3_3: J3.3 J3.4 | length 100
  Top Layer w11.81: J3.3 J3.4
NetJ4_3: J4.3 J4.4 | length 100
  Top Layer w11.81: J4.4 J4.3
NetJ8_1: J8.1 J8.2 R2F.2 | length 240
  Top Layer w11.81: R2F.2@2556.57,1773.62 J8.1 J8.2
NetJ10_3: J10.3 R11C.2 | length 237.4
  Top Layer w11.81: R11C.2 1467.89,664.36 1484.89,681.35 J10.3
NetJ11_1: J11.1 R9C.2 | length 100.1
  Top Layer w11.81: R9C.2 1871.22,816.01 J11.1
NetJ11_3: J11.3 R8C.2 | length 108.4
  Top Layer w11.81: J11.3 R8C.2 R8C.2@2279.62,815.96
NetJ15_1: J15.1 U1G.1 U1G.4 | length 271.7
  Top Layer w11.81: U1G.1 705.24,1070.47 712.16,1063.55 712.16,1002.59 719.08,995.67 U1G.4 ; J15.1 U1G.4@764.35,994.66
NetJ15_2: J15.2 U1G.3 | length 105.1
  Top Layer w11.81: U1G.3 664.35,992.3 J15.2
NetPD_1: PD.1 Q2A.2 R7A.2 U2A.3 | length 501.8
  Top Layer w11.81: U2A.3@1443.58,1238.68 1739.14,1238.68 Q2A.2 1738.95,1238.49 R7A.2 1738.95,1161.79 1816.59,1084.15 1819.56,1081.18 PD.1 ; PD.1@1813.61,1081.18 PD.1 ; PD.1@1823.43,1081.53 PD.1
NetQ1A_2: Q1A.2 R2A.2 | length 61
  Top Layer w11.81: R2A.2 1892.97,1324.67 Q1A.2
NetR3C_1: R3C.1 R4C.1 U2C.3 | length 622.9
  Top Layer w11.81: R3C.1@782.62,288.36 R3C.1 1236.6,295.28 1243.52,302.19 U2C.3 1323.3,375.48 R4C.1 ; R4C.1@1324.98,380.55 R4C.1@1325.27,380.84
NetR3F_2: R3F.2 R4F.1 U1F.4 | length 645.6
  Top Layer w11.81: R4F.1 2016.65,2004.1 R3F.2 1848.53,1726.59 1855.45,1719.67 U1F.4
NetR5C_1: R5C.1 R6C.2 U2C.4 | length 254.8
  Top Layer w11.81: R6C.2 1206.78,431.29 U2C.4@1237.59,462.1 ; U2C.4@1237.62,462.1 1243.52,468 U2C.4 1324.25,477.85 R5C.1
NetR11C_1: R11C.1 R12C.2 | length 139.1
  Top Layer w11.81: R11C.1 1477.61,808.92 1484.53,815.84 R12C.2
OFSN: C9C.2 J12.1 U1C.14 | length 210.2
  Top Layer w9.84: C9C.2 2050.75,430.96 U1C.14
  Top Layer w11.81: J12.1 2050.27,327.5 2050.27,430.48 C9C.2
OUT_N: DIFF.1 R5C.2 U1C.10 | length 773.1
  Top Layer w9.84: R5C.2 1390.02,477.11 1390.02,443.77 1395.79,438 1434.51,438 1435.57,436.95 1457.1,436.95 1463.54,443.39 1463.54,457.22 DIFF.1 1503.33,457.22 1503.33,443.39 1509.77,436.95 1535.5,436.95 1687.37,588.82 1698.9,600.35 U1C.10
OUT_P: DIFF.2 R4C.2 U1C.11 | length 783.9
  Top Layer w9.84: R4C.2 1390.02,379.21 1390.02,412.55 1395.79,418.32 1426.36,418.32 1427.41,417.26 1466.33,417.26 1473.27,410.32 1473.27,387.28 DIFF.2 1493.6,387.28 1493.6,410.32 1500.55,417.26 1543.65,417.26 1707.05,580.67 U1C.11
PS_ON: P2.44
VAGC: R13C.2 U1C.13 | length 271.9
  Top Layer w9.84: R13C.2 1936.88,403.68 2031.07,497.87 U1C.13
VCC: ADC.1 C1C.1 C1E.1 C1F.1 C1G.1 C2C.1 C2E.1 C2F.1 C2G.1 C3C.1 C4C.1 C5.2 C10.2 J1.2 R1C.2 R1C.3 R2B.1 R8C.1 Rb.2 Rb.3 U1C.15 U1F.5 U1G.5 U2.8 U2C.5 U4.1 U4.3 | length 8890
  Top Layer w9.84: U1C.15 2070.44,496.78 v1(2081.54,485.68)
  Top Layer w11.81: R1C.3 2253.82,901.8 R8C.1@2278.09,877.53
  Top Layer w23.62: ADC.1 498.06,279.63 498.06,251.15 504.98,244.23 C2E.1 C1E.1 1034.34,244.23 2446.44,244.23 Rb.2@2594.77,244.23 ; J1.2 523.4,1321.24 604.92,1321.24 ; C10.2 548.87,1797.62 U2.8 469.89,1797.42 462.97,1790.5 462.97,1557.1 469.89,1550.18 798.43,1550.18 807.88,1540.73 C5.2 ; 605.08,1321.4 604.92,1321.24 ; U1G.5 C1G.1 C2G.1 961.28,1070.47 964.76,1073.95 ; v1(1034.72,477.63) 1168.5,477.63 U2C.5 1168.6,477.96 1168.6,552.08 C4C.1 C3C.1 1097.54,787.96 1083.7,801.8 R1C.2 R1C.3 964.76,1073.95 ; U1F.5 2119.81,1718.07 C1F.1 C2F.1 2439.52,1718.07 2446.44,1711.16 2446.44,1275.38 ; v1(2216.63,485.53) C1C.1 2446.27,485.53 2446.44,485.36 ; 2446.44,246.32 2446.44,485.36 ; 2447.8,1276.75 2446.44,1275.38 ; Rb.3@2590.88,143.73 Rb.3@2591.11,143.97 ; Rb.3@2594.57,143.97 Rb.3@2591.11,143.97 ; Rb.3 Rb.2 Rb.2@2594.57,247.43 ; Rb.3@2594.57,147.43 Rb.3@2591.11,143.97 ; 604.92,1321.24 807.55,1321.24 C5.2 ; C5.2 808.22,1321.24 964.43,1321.24 U4.1 1008.01,1320.91 1014.93,1313.99 1014.93,1253.03 1008.01,1246.11 U4.3 964.76,1073.95 ; 2446.44,485.36 2446.44,1275.38
  Bottom Layer w11.81: v1@1034.53,477.44 v1(1034.72,477.63) ; v1(2081.54,485.68) 2081.61,485.6 2216.56,485.6 v1(2216.63,485.53)
  Bottom Layer w23.62: v1@1034.53,244.18 v1@1034.53,477.44
  other v1: 1034.34,243.99
VEE: C7.2 J4.2 U5.2 U5.3 | length 265.6
  Top Layer w11.81: J4.2 912.23,1736.93 1047.23,1736.93 C7.2 1048.59,1737.03 1137.98,1737.03 U5.2 U5.3
VREF: C9C.1 R10C.1 R13C.3 U1C.16 | length 1471.9
  Top Layer w9.84: U1C.16 2090.12,526.51 2113.46,503.17 C9C.1
  Top Layer w11.81: R13C.3@1741.39,297.43 1766.95,271.87 2106.54,271.87 2113.46,278.79 C9C.1
  Bottom Layer w11.81: v1(1193.05,632.47) 1290.99,632.47 1356.77,566.7 1356.77,310.6 1363.69,303.68 R13C.3@1725.09,303.68
pads on no net: P1.23 P1.24 P1.25 P1.26 P1.27 P1.28 P1.29 P1.30 P1.31 P1.32 P1.33 P1.34 P1.35 P1.36 P1.37 P1.38 P1.39 P1.40 P1.41 P1.42 P1.43 P1.44 P1.45 P1.46 P2.27 P2.28 P2.29 P2.30 P2.31 P2.32 P2.33 P2.34 P2.35 P2.36 P2.38 P2.39 P2.41 P2.43 P2.45 P2.46 U1C.2 U1C.3 U1C.9 U1C.12 U2.7 U4.4
copper on no net:
  other v2: 2927.18,171.48 3055.56,171.48 2927.18,1995.69 3055.56,1995.68

## Polygon pours and split planes (outlines as drawn)
GND on Bottom Layer "GND_L02_P011" (solid, pour order 11): 19.69,19.67 19.69,2129.9 2933.07,2129.9 cw(c2933.07,1879.9) 3183.07,1879.9 3183.07,269.67 cw(c2933.07,269.67) 2933.07,19.67
GND on Top Layer "GND_L01_P012" (solid, pour order 12): 19.69,19.67 19.69,2129.9 2933.07,2129.9 cw(c2933.07,1879.9) 3183.07,1879.9 3183.07,269.67 cw(c2933.07,269.67) 2933.07,19.67

## Other copper
Multi-Layer:
  pour cut-out: 1946.62,1553.22 1946.62,1348.19 1635.83,1348.19 1635.83,1553.22
  pour cut-out: 1873.79,1348.19 1873.79,931.56 1780.31,931.56 1780.31,1348.19
  pour cut-out: 1780.31,1264.28 1780.31,931.56 1389.44,931.56 1389.44,1264.28

## Silkscreen, mask and mechanical layers (free items; w line width, h text height)
Top Overlay:
  text "NORMAL" at 1357.07,2039.37 h11.81
  text "EXT" at 1470.23,2039.37 h11.81
  text "-2.5V_EXT" at 1582.68,2039.37 h11.81
  text "GND" at 2964.93,1985.73 h19.68
  text "CAP_OUT3" at 2736.75,1958.89 h11.81 r90
  text "GAIN_OUT2" at 2574.76,1958.21 h11.81 r90
  text "HPF_GAIN" at 2349.84,1910.21 h19.68 r90
  text "CAP_IN3" at 2736.85,1858.71 h11.81 r90
  text "GAIN_IN2" at 2574.86,1858.03 h11.81 r90
  text "NORMAL" at 977.13,1816.51 h11.81 r270
  text "EXT" at 977.13,1703.35 h11.81 r270
  text "V_COM_MODE" at 2551.12,1701.18 h11.81
  text "LNA_OUT" at 2019.69,1582.68 h11.81
  text "HPF_IN" at 2129.92,1582.68 h11.81
  text "-5V_EXT" at 977.13,1578.74 h11.81 r270
  text "NORMAL" at 1236.67,1540.41 h11.81 r270
  text "HPF_OUT2" at 2514.96,1534.25 h11.81
  text "HPF_IN2" at 2618.54,1534.25 h11.81
  text "EXT" at 1236.67,1427.25 h11.81 r270
  text "NORMAL" at 590.16,1396.08 h11.81 r270
  text "TRIMMER" at 1346.63,1380.98 h11.81
  text "VBIAS" at 1359.38,1362.55 h11.81
  text "GAIN_IN" at 2019.69,1338.58 h11.81
  text "HPF_OUT" at 2122.05,1338.58 h11.81
  text "+2.5V_EXT" at 1236.67,1314.8 h11.81 r270
  text "EXT" at 590.16,1282.92 h11.81 r270
  text "+5V_EXT" at 590.16,1158.31 h11.81 r270
  text "K" at 1964.48,1067.33 h19.68
  text "V_COM_MODE" at 869.82,1012.46 h19.68
  text "A" at 1964.47,970.55 h19.68
  text "PIN+" at 641.34,811.02 h11.81
  text "PIN-" at 746.56,811.02 h11.81
  text "LPF_IN2" at 2511.45,768.85 h11.81
  text "LPF_OUT2" at 2609.36,768.85 h11.81
  text "GAIN_MODE" at 1601.38,750.32 h11.81
  text "AGC_MODE" at 1724.41,750.32 h11.81
  text "MODE_LOW" at 1968.5,736.15 h11.81
  text "MODE_HIGH" at 2078.74,736.15 h11.81
  text "GAIN_ADJ" at 1305.8,594.8 h19.68
  text "LPF_OUT" at 637.53,593.22 h11.81
  text "LPF_IN" at 747.76,593.22 h11.81
  text "V_OUT" at 2523.9,458.8 h11.81
  text "V_OUT" at 2629.23,458.8 h11.81
  text "ADC_IN" at 637.53,349.12 h11.81
  text "GAIN_OUT" at 739.89,349.12 h11.81
  text "OPEN = ENABLE" at 1933.14,246.86 h11.81
  text "AGC_SET" at 1724.41,238.94 h19.68
  text "GND" at 2964.93,160.04 h19.68
  text "OpenVLC_RX_2.4" at 1719.46,125.92 h31.5
  text "V_DIVIDER" at 2477.17,100.06 h19.68 r90
  text "IMDEA Networks" at 1714.29,71.56 h31.5
Mechanical 1:
  the board outline again, w10

## Text inside footprints (layer, text, board x,y; h text height)
C2: Top Overlay "+" at 373.46,971.39 h47.24
C11: Top Overlay "+" at 182.69,1819.65 h47.24 r90
C12: Top Overlay "+" at 737.81,1892.78 h47.24 r90